# Altium PCB NewPowerPCB.PcbDoc
Units mm, origin at the board's own origin, x right, y up, seen from the top; angles counter-clockwise.
Board outline 89 x 81 mm, 4 copper layers (Top Layer, Internal Plane 1, Internal Plane 2, Bottom Layer); 75 components, 71 nets, 272 pads, 18 vias.
Unrouted connection lines stored in the file: 3.
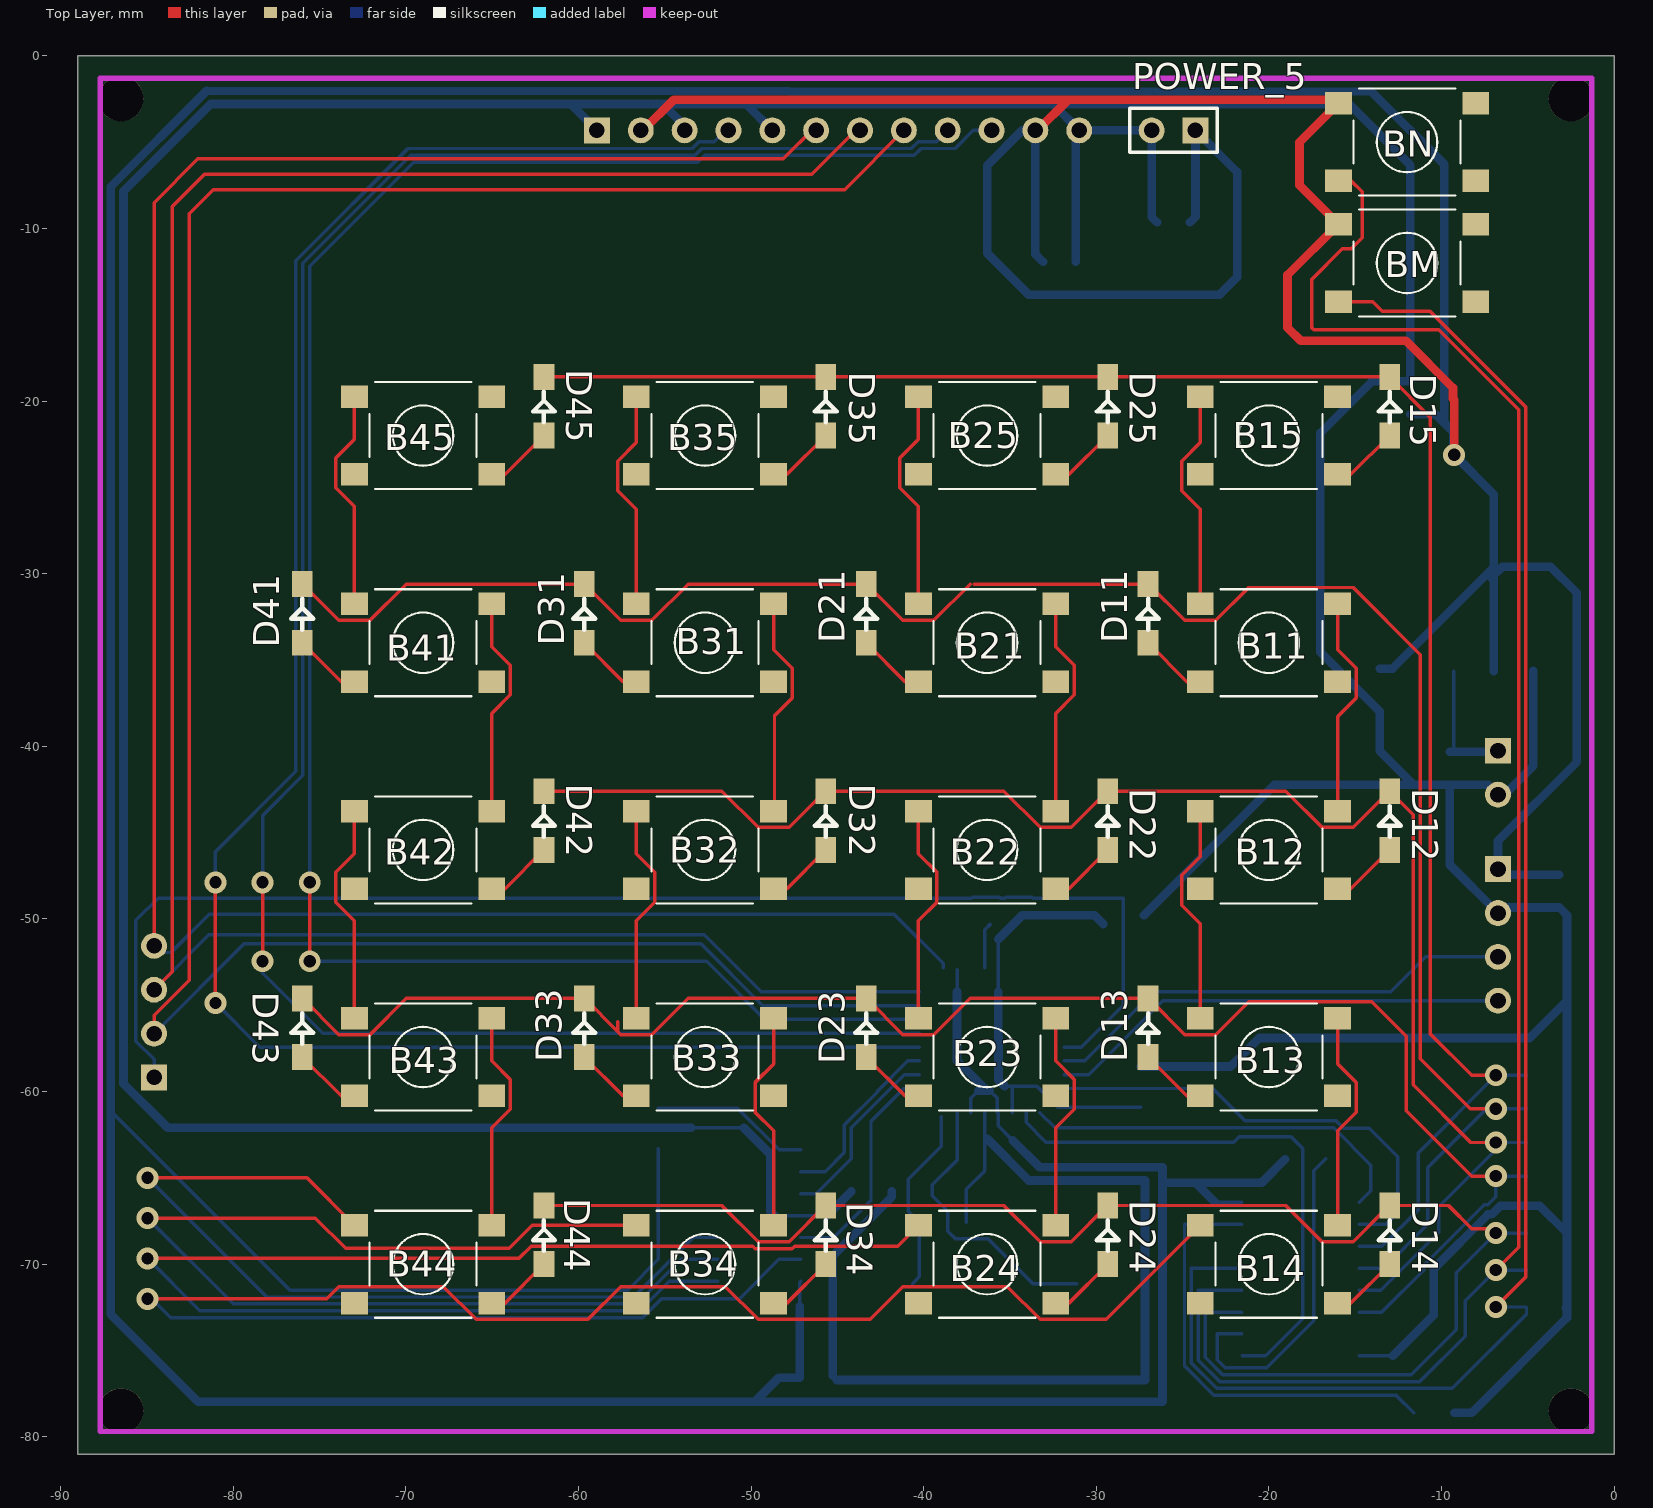
[diagram p0: Top Layer view]
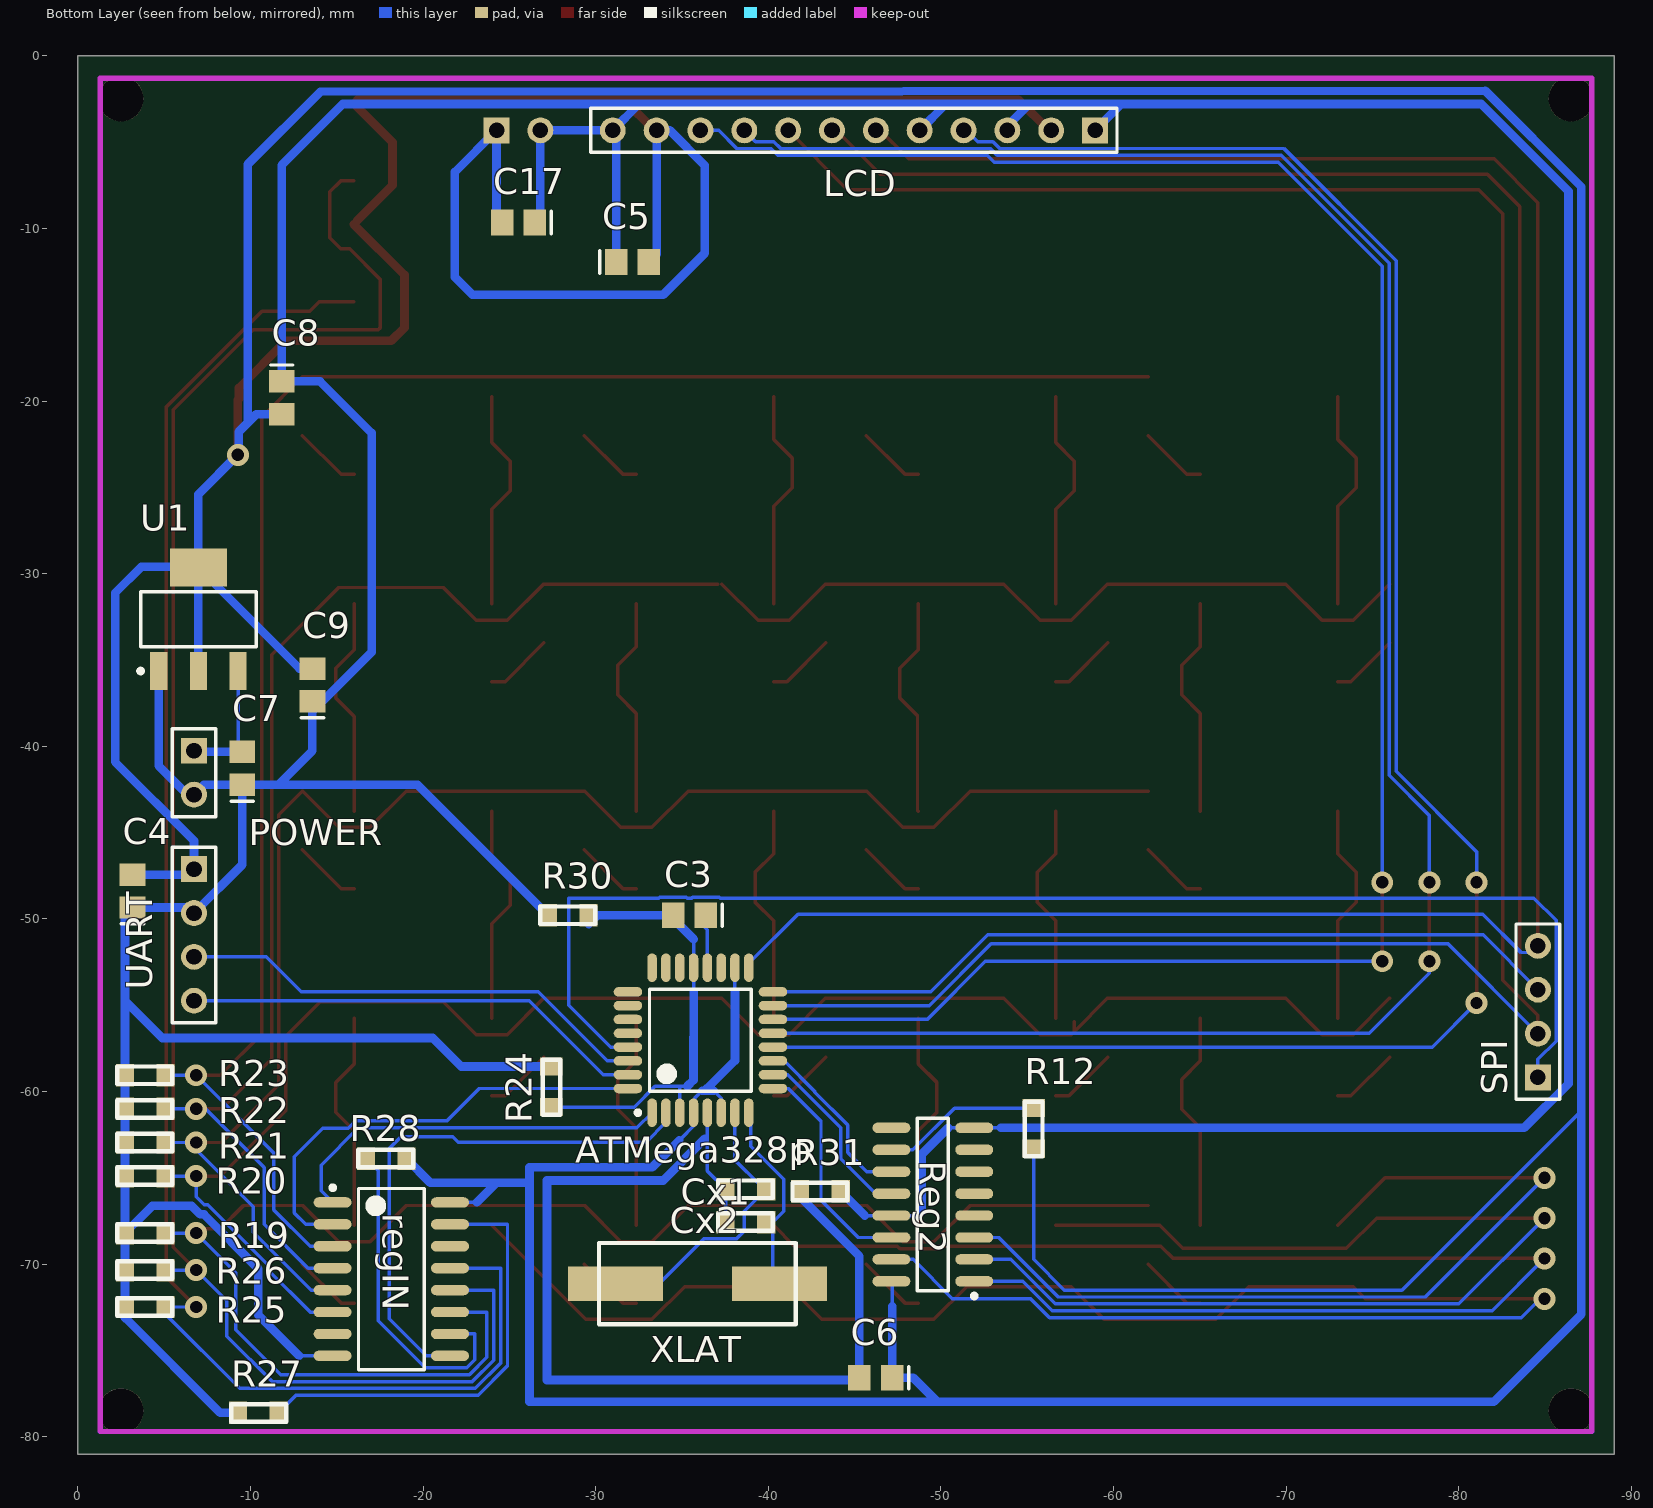
[diagram p1: Bottom Layer view, seen from below]
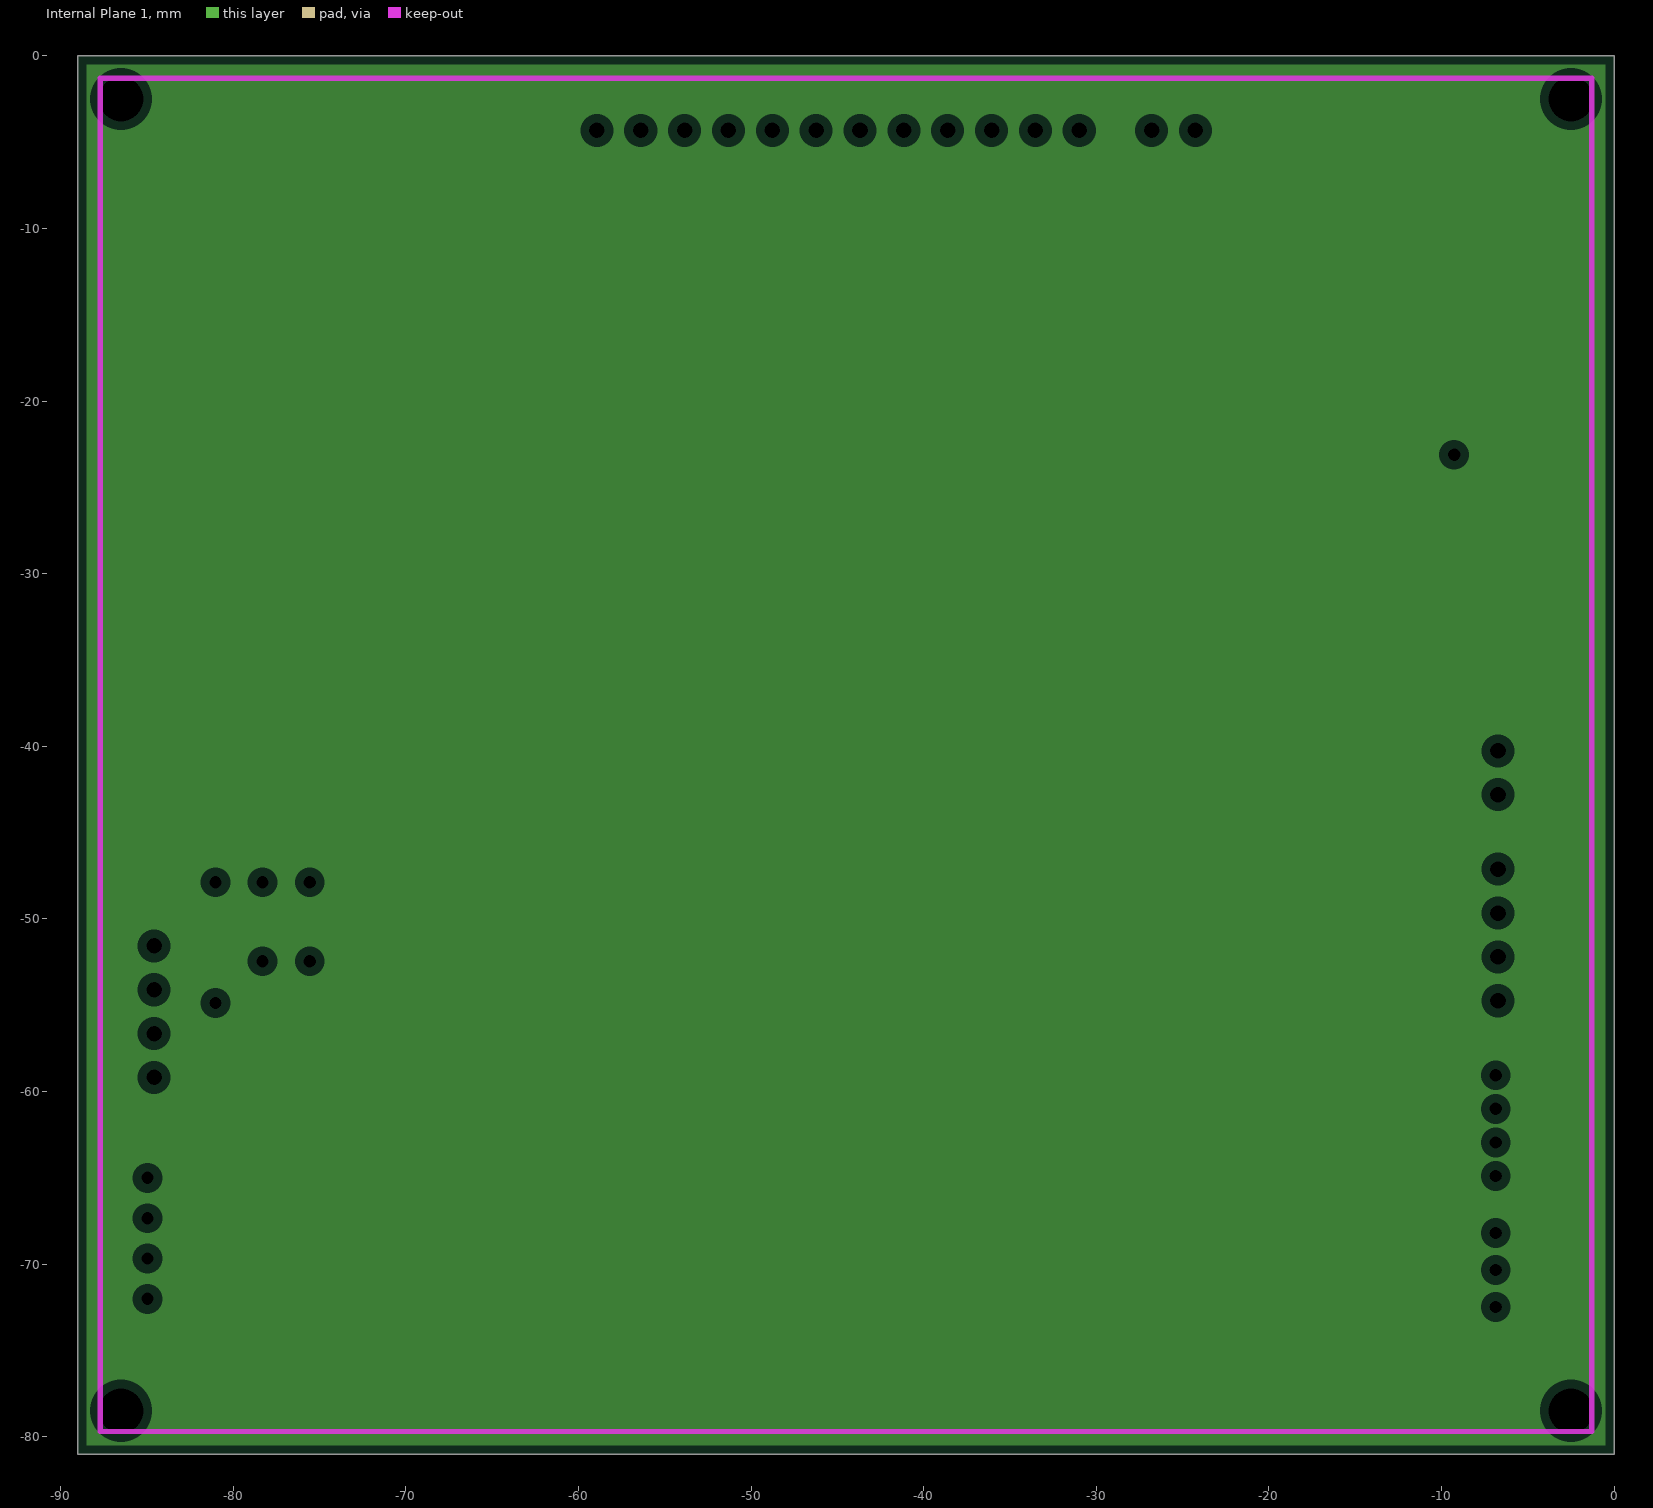
[diagram p2: Internal Plane 1, clearances drawn from the general rule]
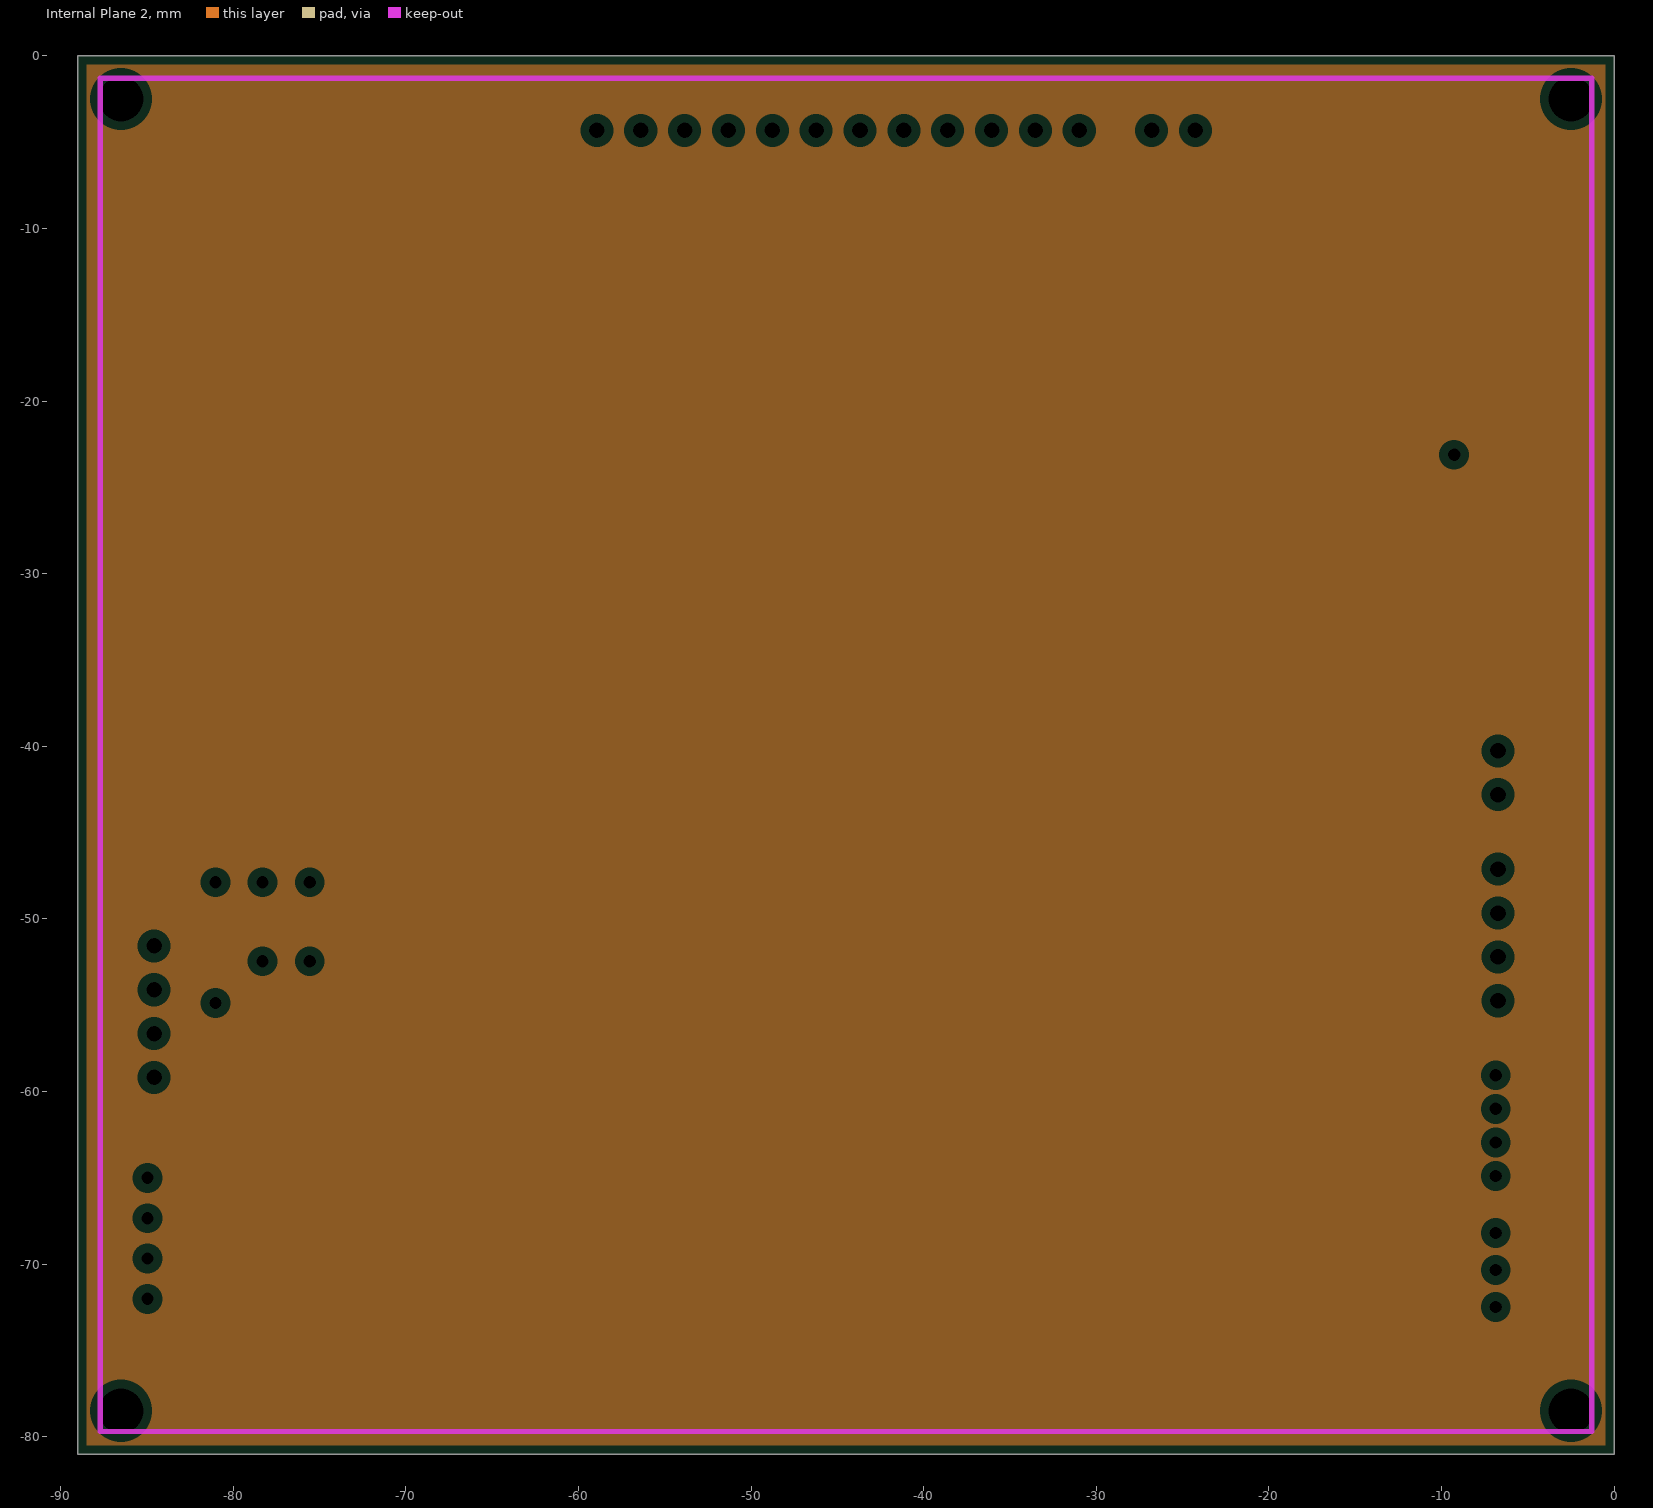
[diagram p3: Internal Plane 2, clearances drawn from the general rule]
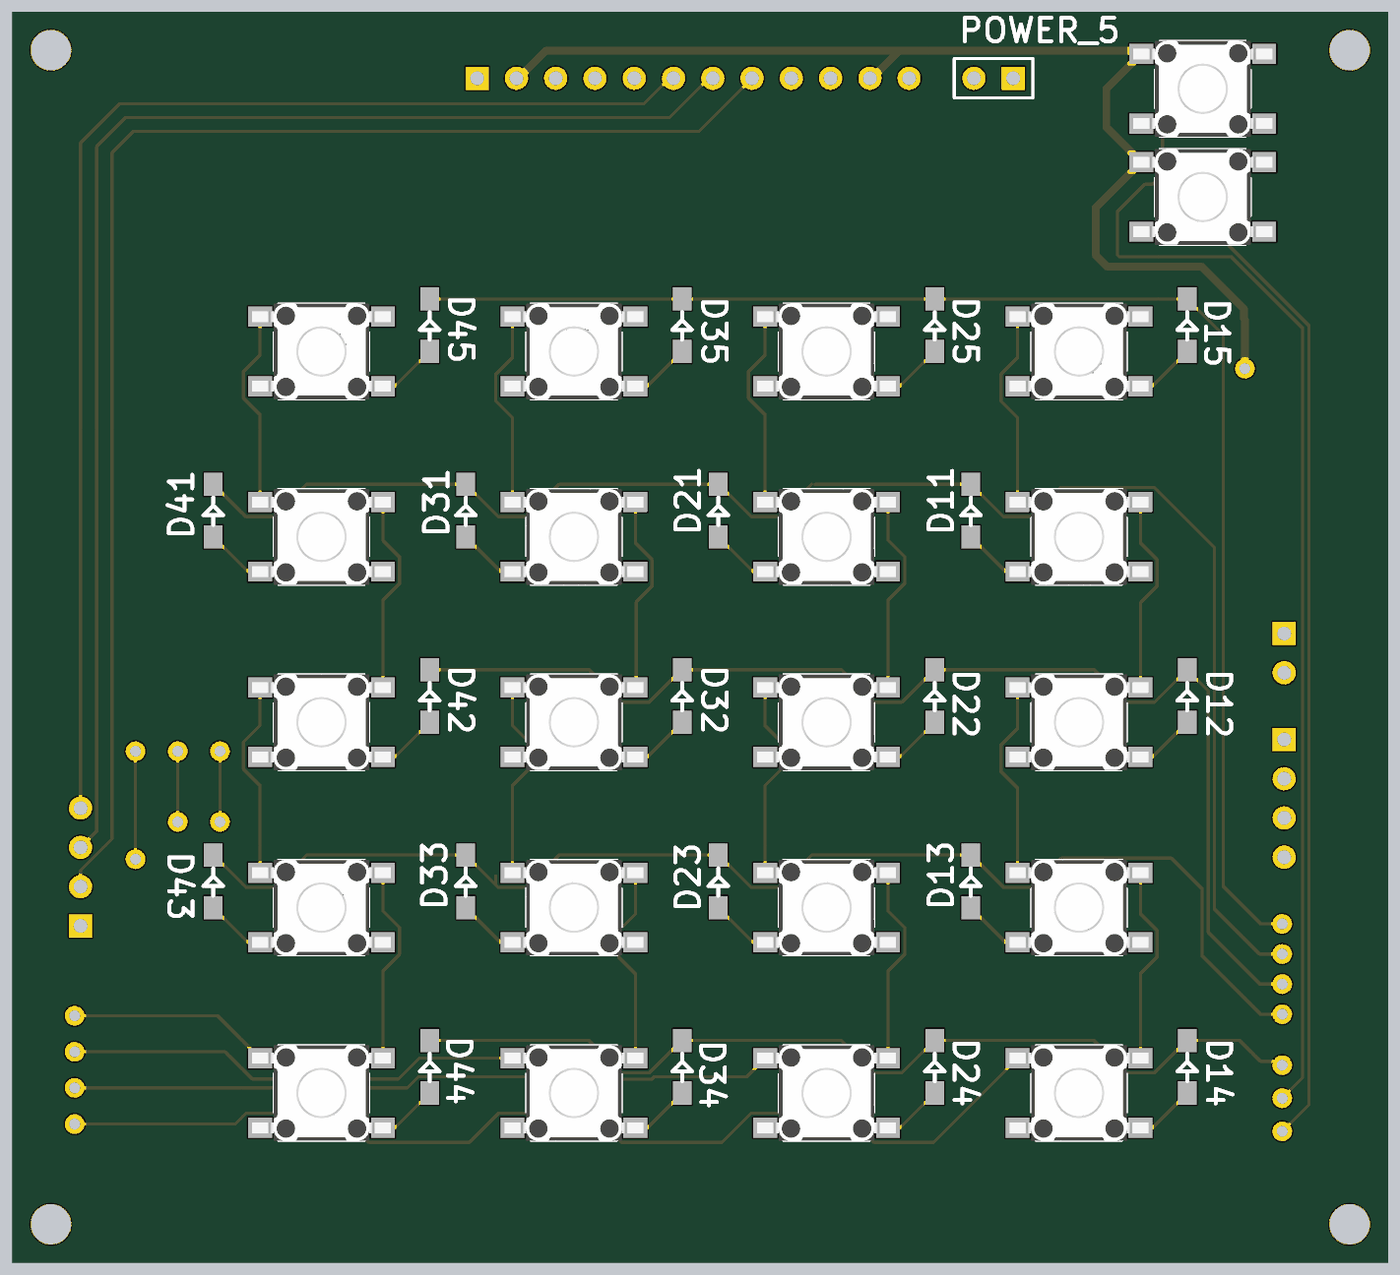
[diagram p4: 3D render of the assembled board from above, using the file's embedded part models]

## Layer stack, top to bottom
Top Solder: solder mask 0.0102, Solder Resist, Dk 3.5
Top Layer: signal copper 0.0356
Dielectric1: dielectric 0.32, FR-4, Dk 4.8
Internal Plane 1: plane copper 0.0356
Dielectric2: dielectric 0.32, FR-4, Dk 4.8
Internal Plane 2: plane copper 0.0356
Dielectric3: dielectric 0.32, FR-4, Dk 4.8
Bottom Layer: signal copper 0.0356
Bottom Solder: solder mask 0.0102, Solder Resist, Dk 3.5

## Board outline
-89,-81 -89,0 0,0 0,-81

## Design rules (kind name [scope] priority, off if disabled: settings)
Clearance [All] p1: gap=0.2
HoleSize [All] p1: absolutevalues=TRUE maxlimit=2.6 minlimit=0.025 maxpercent=80.000 minpercent=20.000
PlaneClearance [All] p1: clearance=0.508
PlaneConnect [All] p1: planeconnectstyle=Relief reliefexpansion=0.508 reliefentries=4 reliefconductorwidth=0.254 reliefairgap=0.254
PolygonConnect [All] p1: connectstyle=Relief reliefconductorwidth=0.254 reliefentries=4 polygonreliefangle="90 Angle" airgapwidth=0.254
RoutingVias [All] p1: holewidth=0.6 width=1 viastyle="Through Hole" minholewidth=0.711 minwidth=1.27 maxholewidth=0.711 maxwidth=1.27
SilkToSolderMaskClearance SilkscreenOverComponentPads [IsPad] p1: minsilkscreentomaskgap=0.254 clearancetoexposedcopper=TRUE
SolderMaskExpansion [All] p1: expansion=0.102
Width [All] p1: maxlimit=1 minlimit=0.2 preferedwidth=0.2 minimp=50.000000 maximp=50.000000 favimp=50.000000
26 further rules are at their usual default settings.

## Components (designator, comment, footprint, x,y, rotation, side; value= is the part's Value field where it differs from the comment)
ATMega328p "ATmega328P-AU" 32A_N -36.068,-57.023 r90 bottom
B11 "TS6604" 430182070816 -20,-34 r180 top
B12 "TS6604" 430182070816 -20,-46 r180 top
B13 "TS6604" 430182070816 -20,-58 r180 top
B14 "TS6604" 430182070816 -20,-70 r180 top
B15 "TS6604" 430182070816 -20,-22 r180 top
B21 "TS6604" 430182070816 -36.33,-34 r180 top
B22 "TS6604" 430182070816 -36.33,-46 r180 top
B23 "TS6604" 430182070816 -36.33,-58 r180 top
B24 "TS6604" 430182070816 -36.33,-70 r180 top
B25 "TS6604" 430182070816 -36.33,-22 r180 top
B31 "TS6604" 430182070816 -52.67,-34 r180 top
B32 "TS6604" 430182070816 -52.67,-46 r180 top
B33 "TS6604" 430182070816 -52.67,-58 r180 top
B34 "TS6604" 430182070816 -52.67,-70 r180 top
B35 "TS6604" 430182070816 -52.67,-22 r180 top
B41 "TS6604" 430182070816 -69,-34 r180 top
B42 "TS6604" 430182070816 -69,-46 r180 top
B43 "TS6604" 430182070816 -69,-58 r180 top
B44 "TS6604" 430182070816 -69,-70 r180 top
B45 "TS6604" 430182070816 -69,-22 r180 top
BM "TS6604" 430182070816 -12,-12 r180 top
BN "TS6604" 430182070816 -12,-5 r180 top
C3 "0.1 uF" 0805 -35.433,-49.784 r0 bottom
C17 "4.7 uF" 0805 -25.527,-9.652 r0 bottom
D11 "1N4148WS" sod323 -27,-34 r90 top
D12 "1N4148WS" sod323 -13,-46 r90 top
D13 "1N4148WS" sod323 -27,-58 r90 top
D14 "1N4148WS" sod323 -13,-70 r90 top
D15 "1N4148WS" sod323 -13,-22 r90 top
D21 "1N4148WS" sod323 -43.333,-34 r90 top
D22 "1N4148WS" sod323 -29.333,-46 r90 top
D23 "1N4148WS" sod323 -43.333,-58 r90 top
D24 "1N4148WS" sod323 -29.333,-70 r90 top
D25 "1N4148WS" sod323 -29.33,-22 r90 top
D31 "1N4148WS" sod323 -59.667,-34 r90 top
D32 "1N4148WS" sod323 -45.667,-46 r90 top
D33 "1N4148WS" sod323 -59.667,-58 r90 top
D34 "1N4148WS" sod323 -45.667,-70 r90 top
D35 "1N4148WS" sod323 -45.67,-22 r90 top
D41 "1N4148WS" sod323 -76,-34 r90 top
D42 "1N4148WS" sod323 -62,-46 r90 top
D43 "1N4148WS" sod323 -76,-58 r90 top
D44 "1N4148WS" sod323 -62,-70 r90 top
D45 "1N4148WS" sod323 -62,-22 r90 top
LCD "DS1021" HDR1X12 -58.928,-4.318 r0 bottom
POWER "DS1021" HDR1X2 -6.731,-40.259 r270 bottom
POWER_5 "DS1021" HDR1X2 -24.257,-4.318 r180 top
R12 "100k" res_0805 -55.372,-60.96 r270 bottom
R19 "100k" res_0805 -5.08,-68.199 r0 bottom
R20 "100k" res_0805 -5.08,-64.897 r0 bottom
R21 "100k" res_0805 -5.08,-62.95 r0 bottom
R22 "100k" res_0805 -5.08,-61.002 r0 bottom
R23 "100k" res_0805 -5.08,-59.055 r0 bottom
R24 "0u" res_0805 -27.432,-58.547 r270 bottom
R25 "100k" res_0805 -5.08,-72.481 r0 bottom
R26 "100k" res_0805 -5.08,-70.34 r0 bottom
R27 "100k" res_0805 -9.271,-78.613 r180 bottom
R28 "100k" res_0805 -19.05,-63.881 r0 bottom
R30 "0u" res_0805 -29.591,-49.784 r0 bottom
R31 "0u" res_0805 -44.196,-65.786 r0 bottom
Reg2 "MC74HC595AD" 751B-05_N -49.53,-66.548 r0 bottom
regIN "HD74HC165FP" PRSP0016DH-B_N -18.161,-70.866 r180 bottom
SPI "DS1021" HDR1X4 -84.582,-59.182 r90 bottom
U1 "HT1117-50_SOT223" SOT223_N -6.985,-32.639 r90 bottom
UART "DS1021" HDR1X4 -6.731,-47.117 r270 bottom
XLAT "M49-16.000-18- 30/50/-40+85" cristal -40.64,-71.12 r0 bottom
С4 "10 uF" 0805 -3.175,-48.387 r90 bottom
С5 "10 uF" 0805 -32.131,-11.938 r180 bottom
С6 "10 uF" 0805 -46.228,-76.581 r0 bottom
С7 "4.7 uF" 0805 -9.525,-41.275 r90 bottom
С8 "4.7 uF" 0805 -11.811,-19.812 r270 bottom
С9 "4.7 uF" 0805 -13.589,-36.449 r90 bottom
Сx1 "10 uF" res_0805 -39.878,-65.659 r0 bottom
Сx2 "10 uF" res_0805 -39.878,-67.564 r0 bottom

## Footprints (in the part's own frame and the unit in brackets; to place one, negate y for a bottom-side part, rotate by r counter-clockwise, add the part's x,y. Pads: shape width x height; smd on the part's side, far side on the other; paste and mask are expansions set on the pad)
32A_N [mm] "Thin QFP, 32-Leads, Body 7x7mm, Pitch 0.8mm, IPC Medium Density"
  oval 1.65x0.55 smd: 1(-4.2,2.8) 2(-4.2,2) 3(-4.2,1.2) 4(-4.2,0.4) 5(-4.2,-0.4) 6(-4.2,-1.2) 7(-4.2,-2) 8(-4.2,-2.8) 17(4.2,-2.8) 18(4.2,-2) 19(4.2,-1.2) 20(4.2,-0.4) 21(4.2,0.4) 22(4.2,1.2) 23(4.2,2) 24(4.2,2.8)
  oval 0.55x1.65 smd: 9(-2.8,-4.2) 10(-2,-4.2) 11(-1.2,-4.2) 12(-0.4,-4.2) 13(0.4,-4.2) 14(1.2,-4.2) 15(2,-4.2) 16(2.8,-4.2) 25(2.8,4.2) 26(2,4.2) 27(1.2,4.2) 28(0.4,4.2) 29(-0.4,4.2) 30(-1.2,4.2) 31(-2,4.2) 32(-2.8,4.2)
  silkscreen extent -4.32,-2.95 2.95,3.75, body extent -3.5,-3.5 3.5,3.5, height 1.2
751B-05_N [mm] "SOIC, 16-Leads, Body 9.9x3.9mm, Pitch 1.27mm, IPC Medium Density"
  oval 2.2x0.6 smd: 1(-2.4,4.445) 2(-2.4,3.175) 3(-2.4,1.905) 4(-2.4,0.635) 5(-2.4,-0.635) 6(-2.4,-1.905) 7(-2.4,-3.175) 8(-2.4,-4.445) 9(2.4,-4.445) 10(2.4,-3.175) 11(2.4,-1.905) 12(2.4,-0.635) 13(2.4,0.635) 14(2.4,1.905) 15(2.4,3.175) 16(2.4,4.445)
  silkscreen extent -2.52,-5 0.9,5.42, body extent -2,-5 2,5, height 1.75
0805 [mm] "Chip Capacitor; Body 2.0 x 1.2 mm (LxW typ)"
  rect 1.3x1.5 smd: 1(-0.95,0) 2(0.95,0)
  silkscreen extent -1.9,-0.65 -1.9,0.65
430182070816 [mm] "6*6mm vertical type, SMD, height 7.0mm, black actuator, 160gf, T&R"
  rect 1.55x1.3 smd: 1(-3.975,2.25) 2(-3.975,-2.25) 3(3.975,2.25) 4(3.975,-2.25)
  silkscreen extent -3.1,-3.1 3.1,3.1, body extent -4.5,-3.1 4.5,3.1, height 7
cristal [mm]
  rect 5.5x2 smd: 0(0,0) 1(9.5,0)
  silkscreen extent -0.95,-2.35 10.45,2.35
HDR1X2 [mm] "Connector; Header; 2 Position"
  rect 1.5x1.5 hole 0.9: 1(0,0)
  round 1.5 hole 0.9: 2(2.54,0)
  silkscreen extent -1.27,-1.27 3.81,1.27
HDR1X4 [mm] "Connector; Header; 4 Position"
  rect 1.5x1.5 hole 0.9: 1(0,0)
  round 1.5 hole 0.9: 2(2.54,0) 3(5.08,0) 4(7.62,0)
  silkscreen extent -1.27,-1.27 8.89,1.27
HDR1X12 [mm] "Connector; Header; 12 Position"
  rect 1.5x1.5 hole 0.9: 1(0,0)
  round 1.5 hole 0.9: 2(2.54,0) 3(5.08,0) 4(7.62,0) 5(10.16,0) 6(12.7,0) 7(15.24,0) 8(17.78,0) 9(20.32,0) 10(22.86,0) 11(25.4,0) 12(27.94,0)
  silkscreen extent -1.27,-1.27 29.21,1.27
PRSP0016DH-B_N [mm] "SOP, 16-Leads, Body 10.06x5.5mm, Pitch 1.27mm, IPC Medium Density"
  oval 2.2x0.6 smd: 1(-3.4,4.445) 2(-3.4,3.175) 3(-3.4,1.905) 4(-3.4,0.635) 5(-3.4,-0.635) 6(-3.4,-1.905) 7(-3.4,-3.175) 8(-3.4,-4.445) 9(3.4,-4.445) 10(3.4,-3.175) 11(3.4,-1.905) 12(3.4,-0.635) 13(3.4,0.635) 14(3.4,1.905) 15(3.4,3.175) 16(3.4,4.445)
  silkscreen extent -3.52,-5.25 1.9,5.42, body extent -2.7,-5.25 2.7,5.25, height 2.2
res_0805 [mm]
  rect 1.05x1.3 smd: 0(0,0) 1(2.35,0)
  silkscreen extent -0.38,-0.51 2.79,0.51
sod323 [mm]
  rect 1.5x1.2 smd: 0(0,0) 1(3.4,0)
  silkscreen extent 0.76,-0.63 2.54,0.64
SOT223_N [mm] "SOT223, 4-Leads, Body 6.5x3.5mm, Pitch 2.3mm, Lead Span 7mm, IPC Medium Density"
  rect 2.2x1 smd: 1(-3,2.3) 2(-3,0) 3(-3,-2.3)
  rect 2.2x3.3 smd: 4(3,0)
  silkscreen extent -3.12,-3.35 1.6,3.48, body extent -1.85,-3.35 1.85,3.35, height 1.8

## Part data
ATMega328p: "8-bit AVR Microcontroller, 32KB Flash, 1KB EEPROM, 2KB SRAM, 32-pin TQFP, Industrial Grade (-40°C to 85°C)"
B11 B12 B13 B14 B15 B21 B22 B23 B24 B25 B31 B32 B33 B34 B35 B41 B42 B43 B44 B45 BM BN: library part 430182070816, "WS-TASV SMD Tact Switch 6X6 mm"
C3 C17 С4 С5 С6 С7 С8 С9 Сx1 Сx2: library part C0805, "Ceramic Chip Capacitor - Standard"
D11 D12 D13 D14 D15 D21 D22 D23 D24 D25 D31 D32 D33 D34 D35 D41 D42 D43 D44 D45: library part SOD323
LCD: library part "Header 12", "Header, 12-Pin"
POWER POWER_5: library part "Header 2", "Header, 2-Pin"
R12 R19 R20 R21 R22 R23 R24 R25 R26 R27 R28 R30 R31: library part res_0805
Reg2: "8-Bit Serial-Input/Serial or Prallel-Output Shift Register with Latched 3-State Outputs"
regIN: "Parallel-Load 8-bit Shift Register"
SPI UART: library part "Header 4", "Header, 4-Pin"
U1: "5.0V, 1A General Purpose LDO"
XLAT: library part cristal_smd

## Free pads (board coordinates)
  round 2.6 hole 2.6: 11(-86.5,-78.5) 12(-86.5,-2.5) 13(-2.5,-78.5) 14(-2.5,-2.5)

## Via types
v1: diameter 1.27, hole 0.711, Top Layer to Bottom Layer, 18 vias

## Nets (pads, with @x,y where several pads share a name; then routed paths per layer and width w, separated by ;. In a path a pad name is that pad's centre, name@x,y a point inside that pad or via, vN(x,y) a via of type N, cw(c..) or ccw(c..) an arc to the next point about the centre after c; other vN are vias at no path point)
GND: ATMega328p.3 ATMega328p.5 ATMega328p.21 C3.2 C17.1 LCD.1 LCD.3 LCD.5 LCD.12 POWER.2 POWER_5.2 R19.1 R20.1 R21.1 R22.1 R23.1 R24.0 R24.1 R25.1 R26.1 R27.0 R30.0 R30.1 R31.0 R31.1 Reg2.8 Reg2.13 regIN.8 U1.1 UART.2 С4.1 С5.1 С6.2 С7.1 С8.1 С9.1 Сx1.1 Сx2.1 | length 451.7
  Bottom Layer w0.2: -53.467,-62.103 Reg2.8 -50.419,-62.103 ; -48.641,-67.183 Reg2.13 -45.593,-67.183 ; Сx2.1 Сx1.1 -36.468,-64.599 ATMega328p.5@-36.468,-61.595 ; ATMega328p.5@-36.468,-61.703 ATMega328p.5@-36.468,-61.595 ; ATMega328p.5 ATMega328p.5@-36.468,-61.595 ; -35.687,-54.229 -35.687,-51.181 ; -35.306,-59.69 -33.438,-59.69 -32.231,-60.897 R24.1 ; ATMega328p.3 -34.868,-59.69 ; regIN.8 -12.827,-75.311 ; -6.604,-66.623 -6.529,-66.548 ; -2.794,-73.152 R25.1@-2.794,-72.545
  Bottom Layer w0.5: LCD.1 -60.452,-2.794 ; LCD.3 -53.848,-4.064 -55.118,-2.794 ; -53.467,-62.103 -83.797,-62.103 -86.356,-59.544 -86.356,-7.844 -81.306,-2.794 -60.452,-2.794 ; -50.419,-62.103 -48.895,-63.627 -48.895,-66.929 -48.641,-67.183 ; LCD.5 -50.292,-2.794 ; -45.593,-67.183 R31.0 ; С6.2@-45.278,-76.454 -45.278,-69.535 -41.846,-66.103 R31.1 ; С6.2@-45.024,-76.708 -27.178,-76.708 -27.178,-65.151 -33.909,-65.151 -36.322,-62.738 ; -35.687,-54.229 -35.668,-59.328 -35.306,-59.69 ; -35.687,-51.181 -34.29,-49.784 -30.099,-49.784 R30.0@-29.591,-50.292 ; С5.1 -31.181,-4.511 LCD.12 ; R24.0 -22.206,-58.547 -20.555,-56.896 -4.889,-56.896 -2.73,-54.737 ; R30.1 -19.682,-42.225 -11.623,-42.225 ; C17.1 -26.797,-9.332 POWER_5.2 LCD.12 ; -12.827,-75.311 -10.456,-72.94 -10.456,-70.263 -7.307,-67.114 -7.095,-67.114 -6.604,-66.623 -4.306,-66.623 R19.1 ; R27.0 -8.255,-78.613 -2.794,-73.152 -2.73,-73.088 R25.1 ; U1.1 -4.685,-41.134 -6.731,-43.18 POWER.2 -7.305,-42.225 С7.1 ; R25.1@-2.794,-72.545 R25.1 ; -60.452,-2.794 -55.118,-2.794 ; -55.118,-2.794 -50.292,-2.794 ; -50.292,-2.794 -32.512,-2.794 ; -32.512,-2.794 LCD.12 ; -32.512,-2.794 -15.349,-2.794 -11.811,-6.332 С8.1 -14.036,-18.862 -17.018,-21.844 -17.018,-34.544 -13.589,-37.973 -13.589,-40.259 -11.623,-42.225 ; -11.623,-42.225 С7.1 ; С7.1 -9.525,-46.863 UART.2 -6.411,-49.337 С4.1 -2.73,-49.782 -2.73,-54.737 ; R25.1 R26.1 R19.1 ; R19.1 R20.1 R21.1 R22.1 R23.1 -2.73,-54.737
NetATMega328p_1: ATMega328p.1 regIN.1 | length 22.9
  Bottom Layer w0.2: ATMega328p.1 -32.388,-62.103 -16.256,-62.103 -14.097,-64.262 -14.097,-65.757 regIN.1
NetATMega328p_2: ATMega328p.2 regIN.9 | length 31.8
  Bottom Layer w0.2: ATMega328p.2 -34.068,-61.786 -32.923,-62.931 -22.031,-62.931 -21.711,-62.611 -18.721,-62.611 -18.034,-63.298 -18.034,-73.152 -20.193,-75.311 regIN.9
NetATMega328p_4: ATMega328p.4 ATMega328p.6 ATMega328p.18 BM.4 BN.4 C17.2 LCD.2 LCD.11 POWER_5.1 R12.1 R28.0 Reg2.16 regIN.16 U1.2 U1.4 UART.1 С4.2 С5.2 С6.1 С8.2 С9.2 | length 499.8
  Top Layer w0.2: BM.4@-16.2,-9.525 BM.4 ; BN.4@-16.185,-2.54 BN.4
  Top Layer w0.5: LCD.2 -56.261,-4.318 -54.483,-2.54 -31.623,-2.54 ; LCD.11 -33.401,-4.318 -31.623,-2.54 ; BM.4@-16.2,-9.525 -18.232,-7.493 -18.232,-5.007 BN.4 ; BN.4@-16.185,-2.54 -31.623,-2.54 ; BM.4 -18.923,-12.698 -18.923,-15.748 -18.161,-16.51 -12.065,-16.51 -9.335,-19.241 -9.335,-19.875 -9.271,-19.939 v1(-9.271,-23.114)
  Bottom Layer w0.2: -87.048,-61.161 -76.708,-71.501 -57.15,-71.501 -55.372,-69.723 R12.1 ; -47.178,-72.451 -47.178,-71.041 Reg2.16 ; -38.068,-54.229 ATMega328p.18@-38.068,-52.95 ; ATMega328p.6 -37.268,-60.382 -36.834,-59.948 ; -36.168,-59.948 -35.743,-60.373 ATMega328p.4@-35.743,-61.223 ; ATMega328p.4@-35.687,-61.242 -35.687,-61.976 -34.939,-62.724 -34.731,-62.724 ; -23.114,-66.421 regIN.16 ; R28.0@-19.05,-63.91 R28.0
  Bottom Layer w0.5: -49.784,-77.965 -48.4,-76.581 С6.1 -47.178,-72.451 ; -38.068,-54.229 -38.068,-58.198 -36.449,-59.817 ; -36.834,-59.948 -36.168,-59.948 ; -34.835,-62.828 -33.274,-64.389 -26.162,-64.389 -26.162,-77.965 -82.032,-77.965 -87.1,-72.897 -87.1,-7.598 -81.532,-2.03 -14.037,-2.092 -9.845,-6.284 -9.845,-21.257 ; С5.2 -33.528,-11.491 LCD.11 -34.29,-4.318 -36.322,-6.35 -36.322,-11.43 -33.909,-13.843 -22.86,-13.843 -21.844,-12.827 -21.844,-6.731 POWER_5.1 -24.257,-9.332 C17.2 ; -26.035,-65.278 -20.418,-65.278 R28.0@-19.05,-63.91 ; -24.257,-65.278 -23.114,-66.421 ; С9.2 -12.845,-35.499 U1.4 ; С8.2 -10.34,-20.762 -9.845,-21.257 ; U1.4@-7.112,-30.226 -6.477,-29.591 -3.683,-29.591 -2.159,-31.115 -2.159,-40.904 -6.731,-45.476 UART.1 -6.411,-47.437 С4.2 ; U1.2 U1.4 ; -9.845,-21.257 -9.328,-21.774 -9.328,-23.057 v1(-9.271,-23.114) -6.985,-25.4 U1.4
NetATMega328p_7: ATMega328p.7 XLAT.1 Сx1.0 | length 16.5
  Bottom Layer w0.2: ATMega328p.7 -38.068,-63.976 -39.497,-65.405 -39.497,-66.04 -38.608,-66.929 -38.608,-68.083 -38.177,-68.514 -36.286,-68.514 -33.68,-71.12 XLAT.1
NetATMega328p_8: ATMega328p.8 XLAT.0 Сx2.0 | length 10.9
  Bottom Layer w0.2: XLAT.0 -40.259,-70.739 -40.259,-67.564 -40.894,-66.929 -40.894,-65.076 -39.569,-63.751 -38.989,-63.171 ATMega328p.8@-38.989,-61.448
NetATMega328p_9: ATMega328p.9 Reg2.14 | length 13.1
  Bottom Layer w0.2: Reg2.14 -45.212,-68.453 -43.053,-66.294 -43.053,-61.722 -41.154,-59.823 ATMega328p.9
NetATMega328p_10: ATMega328p.10 Reg2.12 | length 10.8
  Bottom Layer w0.2: Reg2.12 -46.228,-65.913 -44.196,-63.881 -44.196,-62.103 -41.116,-59.023 ATMega328p.10
NetATMega328p_11: ATMega328p.11 Reg2.11 | length 10.5
  Bottom Layer w0.2: Reg2.11 -45.708,-64.643 -44.596,-63.531 -44.596,-61.937 -42.691,-60.032 -42.691,-59.994 -40.92,-58.223 ATMega328p.11
NetATMega328p_12: ATMega328p.12 LCD.4 | length 114.9
  Top Layer w0.2: v1(-81.026,-54.864) v1(-81.026,-47.879)
  Bottom Layer w0.2: v1(-81.026,-54.864) -78.467,-57.423 ATMega328p.12 ; v1(-81.026,-47.879) -81.026,-46.101 -76.365,-41.44 -76.365,-11.861 -69.872,-5.368 -53.413,-5.368 -53.013,-4.968 -52.143,-4.968 -51.493,-4.318 LCD.4
NetATMega328p_13: ATMega328p.13 LCD.9 | length 122.1
  Top Layer w0.2: v1(-78.295,-52.451) v1(-78.295,-47.879)
  Bottom Layer w0.2: v1(-78.295,-52.451) -78.295,-53.149 -74.822,-56.623 ATMega328p.13 ; v1(-78.295,-47.879) -78.295,-44.005 -75.965,-41.675 -75.965,-12.026 -69.707,-5.768 -53.247,-5.768 -52.847,-5.368 -40.713,-5.368 -40.313,-4.968 -39.258,-4.968 LCD.9
NetATMega328p_14: ATMega328p.14 LCD.10 | length 119.7
  Top Layer w0.2: v1(-75.565,-52.451) v1(-75.565,-47.879)
  Bottom Layer w0.2: v1(-75.565,-52.451) -52.578,-52.451 -49.206,-55.823 ATMega328p.14 ; v1(-75.565,-47.879) -75.565,-12.192 -69.541,-6.168 -53.082,-6.168 -52.682,-5.768 -40.547,-5.768 -40.147,-5.368 -38.173,-5.368 -37.123,-4.318 LCD.10
NetATMega328p_15: ATMega328p.15 LCD.8 SPI.2 | length 139.7
  Top Layer w0.2: SPI.2 -84.582,-55.587 -82.55,-53.555 -82.55,-9.144 -81.153,-7.747 -44.577,-7.747 LCD.8
  Bottom Layer w0.2: SPI.2 -79.375,-51.435 -52.902,-51.435 -49.314,-55.023 ATMega328p.15
NetATMega328p_16: ATMega328p.16 LCD.7 SPI.3 | length 134.4
  Top Layer w0.2: SPI.3 -83.532,-53.052 -83.532,-8.729 -81.661,-6.858 -46.482,-6.858 LCD.7@-43.815,-4.191
  Bottom Layer w0.2: SPI.3 -81.407,-50.927 -52.705,-50.927 -49.409,-54.223 ATMega328p.16
NetATMega328p_17: ATMega328p.17 LCD.6 SPI.4 | length 131.3
  Top Layer w0.2: SPI.4 -84.582,-8.509 -82.042,-5.969 -48.133,-5.969 LCD.6@-46.355,-4.191
  Bottom Layer w0.2: SPI.4 -84.201,-51.943 -83.604,-51.943 -81.382,-49.721 -41.719,-49.721 -38.868,-52.572 ATMega328p.17
NetATMega328p_20: ATMega328p.20 C3.1 | length 2.7
  Bottom Layer w0.2: ATMega328p.20 -36.468,-50.631 C3.1@-36.129,-50.292
NetATMega328p_29: ATMega328p.29 SPI.1 | length 78
  Bottom Layer w0.2: SPI.1 -84.582,-58.127 -85.632,-57.077 -85.632,-50.072 -84.351,-48.791 ; -84.328,-48.814 -37.237,-48.814 -37.157,-48.734 -35.609,-48.734 -35.529,-48.814 -35.337,-48.814 -35.257,-48.734 -33.709,-48.734 -33.629,-48.814 -28.448,-48.814 -28.448,-54.991 -30.88,-57.423 ATMega328p.29
NetATMega328p_30: ATMega328p.30 UART.3 | length 27.6
  Bottom Layer w0.2: ATMega328p.30 -30.664,-58.223 -26.67,-54.229 -12.941,-54.229 -10.909,-52.197 UART.3
NetATMega328p_31: ATMega328p.31 UART.4 | length 26.9
  Bottom Layer w0.2: ATMega328p.31 -30.448,-59.023 -26.162,-54.737 UART.4
NetATMega328p_32: ATMega328p.32 regIN.2 | length 26.7
  Bottom Layer w0.2: ATMega328p.32 -23.247,-59.823 -21.367,-61.703 -16.09,-61.703 -15.662,-62.131 -14.196,-62.131 -12.549,-63.778 -12.549,-67.032 -13.208,-67.691 regIN.2
NetB11_2: B11.2 B12.2 | length 12.9
  Top Layer w0.2: B12.2 -16.025,-38.275 -14.95,-37.2 -14.95,-35.476 -16.025,-34.401 B11.2
NetB11_3: B11.3 D11.0 | length 4
  Top Layer w0.2: D11.0 -24.75,-36.25 B11.3
NetB11_4: B11.4 B15.4 | length 12.9
  Top Layer w0.2: B11.4 -23.975,-26.275 -25.05,-25.2 -25.05,-23.476 -23.975,-22.401 B15.4
NetB12_1: B12.1 D12.0 | length 4
  Top Layer w0.2: B12.1 -15.25,-48.25 D12.0
NetB12_4: B12.4 B13.4 | length 12.9
  Top Layer w0.2: B13.4 -23.975,-50.275 -25.05,-49.2 -25.05,-47.476 -23.975,-46.401 B12.4
NetB13_2: B13.2 B14.2 | length 12.9
  Top Layer w0.2: B14.2 -16.025,-62.275 -14.95,-61.2 -14.95,-59.476 -16.025,-58.401 B13.2
NetB13_3: B13.3 D13.0 | length 4
  Top Layer w0.2: D13.0 -24.75,-60.25 B13.3
NetB14_1: B14.1 D14.0 | length 4
  Top Layer w0.2: B14.1 -15.25,-72.25 D14.0
NetB14_4: B14.4 Reg2.15 | length 107.2
  Top Layer w0.2: v1(-84.963,-72.009) -84.954,-72 -74.574,-72 -73.874,-71.3 -67.824,-71.3 -65.924,-73.2 -59.444,-73.2 -57.544,-71.3 -51.494,-71.3 -49.594,-73.2 -43.104,-73.2 -41.204,-71.3 -35.154,-71.3 -33.254,-73.2 -29.425,-73.2 B14.4
  Bottom Layer w0.2: v1(-84.963,-72.009) -84.954,-72 -84.718,-72 -83.617,-73.101 -56.291,-73.101 -55.19,-72 -50.664,-72 -48.387,-69.723 Reg2.15
NetB15_1: B15.1 D15.0 | length 4
  Top Layer w0.2: B15.1 -15.25,-24.25 D15.0
NetB21_2: B21.2 B22.2 | length 12.9
  Top Layer w0.2: B22.2 -32.355,-38.099 -31.28,-37.024 -31.28,-35.3 -32.355,-34.225 B21.2
NetB21_3: B21.3 D21.0 | length 4
  Top Layer w0.2: D21.0 -41.083,-36.25 B21.3
NetB21_4: B21.4 B25.4 | length 12.9
  Top Layer w0.2: B21.4 -40.305,-26.099 -41.38,-25.024 -41.38,-23.3 -40.305,-22.225 B25.4
NetB22_1: B22.1 D22.0 | length 4
  Top Layer w0.2: B22.1 -31.583,-48.25 D22.0
NetB22_4: B22.4 B23.4 | length 12.9
  Top Layer w0.2: B23.4 -40.305,-50.099 -39.23,-49.024 -39.23,-47.3 -40.305,-46.225 B22.4
NetB23_2: B23.2 B24.2 | length 12.9
  Top Layer w0.2: B24.2 -32.355,-62.099 -31.28,-61.024 -31.28,-59.3 -32.355,-58.225 B23.2
NetB23_3: B23.3 D23.0 | length 4
  Top Layer w0.2: D23.0 -41.083,-60.25 B23.3
NetB24_1: B24.1 D24.0 | length 4
  Top Layer w0.2: B24.1 -31.583,-72.25 D24.0
NetB24_4: B24.4 Reg2.1 | length 80.6
  Top Layer w0.2: v1(-84.963,-69.667) -63.441,-69.667 -62.724,-68.95 -49.91,-68.95 -49.76,-69.1 -47.63,-69.1 -47.48,-68.95 -41.505,-68.95 B24.4
  Bottom Layer w0.2: v1(-84.963,-69.667) -81.929,-72.701 -56.457,-72.701 -54.749,-70.993 Reg2.1
NetB25_1: B25.1 D25.0 | length 4
  Top Layer w0.2: B25.1 -31.58,-24.25 D25.0
NetB31_2: B31.2 B32.2 | length 12.9
  Top Layer w0.2: B32.2 -48.641,-43.696 -48.641,-38.221 -47.62,-37.2 -47.62,-35.476 -48.695,-34.401 B31.2
NetB31_3: B31.3 D31.0 | length 4
  Top Layer w0.2: D31.0 -57.417,-36.25 B31.3
NetB31_4: B31.4 B35.4 | length 12.9
  Top Layer w0.2: B31.4 -56.645,-26.275 -57.72,-25.2 -57.72,-23.476 -56.645,-22.401 B35.4
NetB32_1: B32.1 D32.0 | length 4
  Top Layer w0.2: B32.1 -47.917,-48.25 D32.0
NetB32_4: B32.4 B33.4 | length 12.9
  Top Layer w0.2: B33.4 -56.645,-50.099 -55.57,-49.024 -55.57,-47.3 -56.645,-46.225 B32.4
NetB33_2: B33.2 B34.2 | length 12.9
  Top Layer w0.2: B34.2 -48.695,-62.275 -49.77,-61.2 -49.77,-59.476 -48.695,-58.401 B33.2
NetB33_3: B33.3 D33.0 | length 4
  Top Layer w0.2: D33.0 -57.417,-60.25 B33.3
NetB34_1: B34.1 D34.0 | length 4
  Top Layer w0.2: B34.1 -47.917,-72.25 D34.0
NetB34_4: B34.4 Reg2.2 | length 65.8
  Top Layer w0.2: v1(-84.963,-67.333) -75.241,-67.333 -73.486,-69.088 -64.008,-69.088 -62.67,-67.75 B34.4
  Bottom Layer w0.2: v1(-84.963,-67.333) -79.995,-72.301 -56.622,-72.301 -54.044,-69.723 Reg2.2
NetB35_1: B35.1 D35.0 | length 4
  Top Layer w0.2: B35.1 -47.92,-24.25 D35.0
NetB41_2: B41.2 B42.2 | length 12.9
  Top Layer w0.2: B42.2 -65.025,-38.099 -63.95,-37.024 -63.95,-35.3 -65.025,-34.225 B41.2
NetB41_3: B41.3 D41.0 | length 4
  Top Layer w0.2: D41.0 -73.75,-36.25 B41.3
NetB41_4: B41.4 B45.4 | length 12.9
  Top Layer w0.2: B41.4 -72.975,-26.099 -74.05,-25.024 -74.05,-23.3 -72.975,-22.225 B45.4
NetB42_1: B42.1 D42.0 | length 4
  Top Layer w0.2: B42.1 -64.25,-48.25 D42.0
NetB42_4: B42.4 B43.4 | length 12.9
  Top Layer w0.2: B43.4 -72.975,-50.099 -74.05,-49.024 -74.05,-47.3 -72.975,-46.225 B42.4
NetB43_2: B43.2 B44.2 | length 12.9
  Top Layer w0.2: B44.2 -65.025,-62.099 -63.95,-61.024 -63.95,-59.3 -65.025,-58.225 B43.2
NetB43_3: B43.3 D43.0 | length 4
  Top Layer w0.2: D43.0 -73.75,-60.25 B43.3
NetB44_1: B44.1 D44.0 | length 4
  Top Layer w0.2: B44.1 -64.25,-72.25 D44.0
NetB44_4: B44.4 Reg2.3 | length 50.4
  Top Layer w0.2: v1(-84.963,-65) -75.725,-65 B44.4
  Bottom Layer w0.2: v1(-84.963,-65) -78.062,-71.901 -56.788,-71.901 -53.34,-68.453 Reg2.3
NetB45_1: B45.1 D45.0 | length 4
  Top Layer w0.2: B45.1 -64.25,-24.25 D45.0
NetBM_3: BM.3 R25.0 regIN.13 | length 98.6
  Top Layer w0.2: BM.3 -13.975,-14.25 -13.425,-14.8 -10.669,-14.8 -5.135,-20.334 -5.135,-70.758 v1(-6.858,-72.481)
  Bottom Layer w0.2: regIN.13 -24.492,-70.231 -24.492,-75.726 -23.021,-77.197 -9.379,-77.197 -5.08,-72.898 R25.0 v1(-6.858,-72.481)
NetBN_3: BN.3 R26.0 regIN.12 | length 105.3
  Top Layer w0.2: BN.3 -15.229,-7.25 -14.605,-7.874 -14.605,-10.541 -15.24,-11.176 -15.751,-11.176 -17.507,-12.932 -17.507,-15.767 -17.399,-15.875 -10.16,-15.875 -5.535,-20.5 -5.535,-69.017 v1(-6.858,-70.34)
  Bottom Layer w0.2: regIN.12 -24.092,-71.501 -24.092,-75.56 -22.855,-76.797 -11.265,-76.797 -8.636,-74.168 -8.636,-72.118 v1(-6.858,-70.34) R26.0
NetD11_1: D11.1 D21.1 D31.1 D41.1 R22.0 regIN.4 | length 117.4
  Top Layer w0.2: D41.1 -75.974,-30.6 -73.874,-32.7 -72.076,-32.7 -69.976,-30.6 D31.1 -59.644,-30.6 -57.544,-32.7 -55.746,-32.7 -53.646,-30.6 D21.1 -43.304,-30.6 -41.204,-32.7 -39.406,-32.7 -37.306,-30.6 ; -37.077,-30.6 D11.1 -26.974,-30.6 -24.874,-32.7 -23.076,-32.7 -21.176,-30.8 -15.126,-30.8 -11.24,-34.686 -11.24,-58.102 -8.34,-61.002 v1(-6.858,-61.002)
  Bottom Layer w0.2: regIN.4 -13.335,-70.231 -10.795,-67.691 -10.795,-64.401 -7.397,-61.002 v1(-6.858,-61.002) R22.0
NetD12_1: D12.1 D22.1 D32.1 D42.1 R21.0 regIN.5 | length 92.3
  Top Layer w0.2: D42.1 -51.694,-42.6 -49.594,-44.7 -47.796,-44.7 -45.696,-42.6 D32.1 -35.354,-42.6 -33.254,-44.7 -31.456,-44.7 -29.356,-42.6 D22.1 -19.024,-42.6 -16.924,-44.7 -15.126,-44.7 D12.1@-13.026,-42.6 ; D12.1 -11.64,-43.96 -11.64,-59.607 -8.297,-62.95 v1(-6.858,-62.95)
  Bottom Layer w0.2: regIN.5 -13.52,-71.501 -10.16,-68.141 -10.16,-66.675 -6.858,-63.373 v1(-6.858,-62.95) R21.0
NetD13_1: D13.1 D23.1 D33.1 D43.1 R20.0 regIN.6 | length 97.1
  Top Layer w0.2: D43.1 -75.974,-54.6 -73.874,-56.7 -72.076,-56.7 -69.976,-54.6 D33.1 -59.644,-54.6 -57.72,-56.524 ; -57.72,-55.945 -57.72,-56.524 ; v1(-6.858,-64.897) -8.255,-64.897 -12.04,-61.112 -12.04,-56.794 -14.034,-54.8 -21.176,-54.8 -23.076,-56.7 -24.874,-56.7 -26.974,-54.6 D13.1 -37.306,-54.6 -39.406,-56.7 -41.204,-56.7 -43.304,-54.6 D23.1 -53.646,-54.6 -55.746,-56.7 -57.544,-56.7 -57.72,-56.524
  Bottom Layer w0.2: regIN.6 -13.462,-72.771 -11.006,-70.315 -11.006,-70.035 -7.535,-66.564 -7.323,-66.564 -6.858,-66.099 v1(-6.858,-64.897) R20.0
NetD14_1: D14.1 D24.1 D34.1 D44.1 R19.0 regIN.11 | length 89.9
  Top Layer w0.2: D44.1 -51.694,-66.6 -49.594,-68.7 -47.796,-68.7 -45.696,-66.6 D34.1 -35.354,-66.6 -33.254,-68.7 -31.456,-68.7 -29.356,-66.6 D24.1 -19.024,-66.6 -16.924,-68.7 -15.126,-68.7 -13.026,-66.6 D14.1 -9.6,-66.6 -8.255,-67.945 -7.339,-67.945 v1@-7.085,-68.199
  Bottom Layer w0.2: regIN.11 -23.692,-72.771 -23.692,-75.394 -22.689,-76.397 -11.754,-76.397 -9.144,-73.787 -9.144,-70.485 v1(-6.858,-68.199) R19.0
NetD15_1: D15.1 D25.1 D35.1 D45.1 R23.0 regIN.3 | length 108.5
  Top Layer w0.2: D45.1 D15.1 -10.668,-20.932 -10.668,-56.642 -8.255,-59.055 v1(-6.858,-59.055)
  Bottom Layer w0.2: regIN.3 -13.462,-68.961 -11.36,-66.859 -11.36,-63.557 v1(-6.858,-59.055) R23.0
NetPOWER_1: POWER.1 U1.3 С7.2 | length 7.6
  Bottom Layer w0.2: С7.2 -9.285,-40.085 U1.3
  Bottom Layer w0.5: С7.2 -6.797,-40.325 POWER.1
NetR12_0: R12.0 Reg2.10 | length 9.2
  Bottom Layer w0.2: R12.0 -50.784,-60.96 -48.371,-63.373 Reg2.10
NetR27_1: R27.1 regIN.15 | length 25.9
  Bottom Layer w0.2: regIN.15 -24.892,-67.691 -24.892,-75.891 -23.186,-77.597 -12.637,-77.597 R27.1
NetR28_1: R28.1 regIN.10 | length 19.5
  Bottom Layer w0.2: regIN.10 -22.987,-74.041 -22.987,-75.534 -22.524,-75.997 -20.117,-75.997 -17.399,-73.279 -17.399,-64.58 R28.1
pads on no net: ATMega328p.19 ATMega328p.22 ATMega328p.23 ATMega328p.24 ATMega328p.25 ATMega328p.26 ATMega328p.27 ATMega328p.28 B11.1 B12.3 B13.1 B14.3 B15.2 B15.3 B21.1 B22.3 B23.1 B24.3 B25.2 B25.3 B31.1 B32.3 B33.1 B34.3 B35.2 B35.3 B41.1 B42.3 B43.1 B44.3 B45.2 B45.3 BM.1 BM.2 BN.1 BN.2 Reg2.4 Reg2.5 Reg2.6 Reg2.7 Reg2.9 regIN.7 regIN.14

## Polygon pours and split planes (outlines as drawn)
no net on Internal Plane 1 (split plane): -0.51,-80.49 -88.49,-80.49 -88.49,-0.51 -0.51,-0.51
no net on Internal Plane 2 (split plane): -0.51,-80.49 -88.49,-80.49 -88.49,-0.51 -0.51,-0.51

## Keep-outs
Keep-Out Layer:
  lines w0.3: -87.7,-79.7 -1.3,-79.7 -1.3,-1.3 -87.7,-1.3 -87.7,-79.7

## Silkscreen, mask and mechanical layers (free items; w line width, h text height)
Mechanical 1:
  the board outline again, w0.1
Mechanical 4:
  lines w0.254: -17.145,-46.101 -9.779,-46.101 -8.001,-44.323 -8.001,-44.069 cw(c-3.302,-41.91) -5.461,-37.211 ; -8.636,-44.704 cw(c-8.445,-45.276) -7.874,-45.085
Drill Drawing:
  text ".LEGEND" at 5.08,-75.92 h1.52
  text "Drill Drawing." at 5.08,-78.46 h1.52

## Dimensions
-87.7,-79.7 to -1.3,-79.7 on Mechanical 1
-87.7,-79.7 to -87.7,-1.3 on Mechanical 1